# Altium PCB PCBKvant3DPrinter_TopologicalSort.PcbDoc (part 2 of 2)
Units mm, origin at the board's own origin, x right, y up, seen from the top; angles counter-clockwise.
Board outline 112.65 x 119.38 mm, 2 copper layers (Top Layer, Bottom Layer); 226 components, 215 nets, 744 pads, 71 vias.
Unrouted connection lines stored in the file: 213.
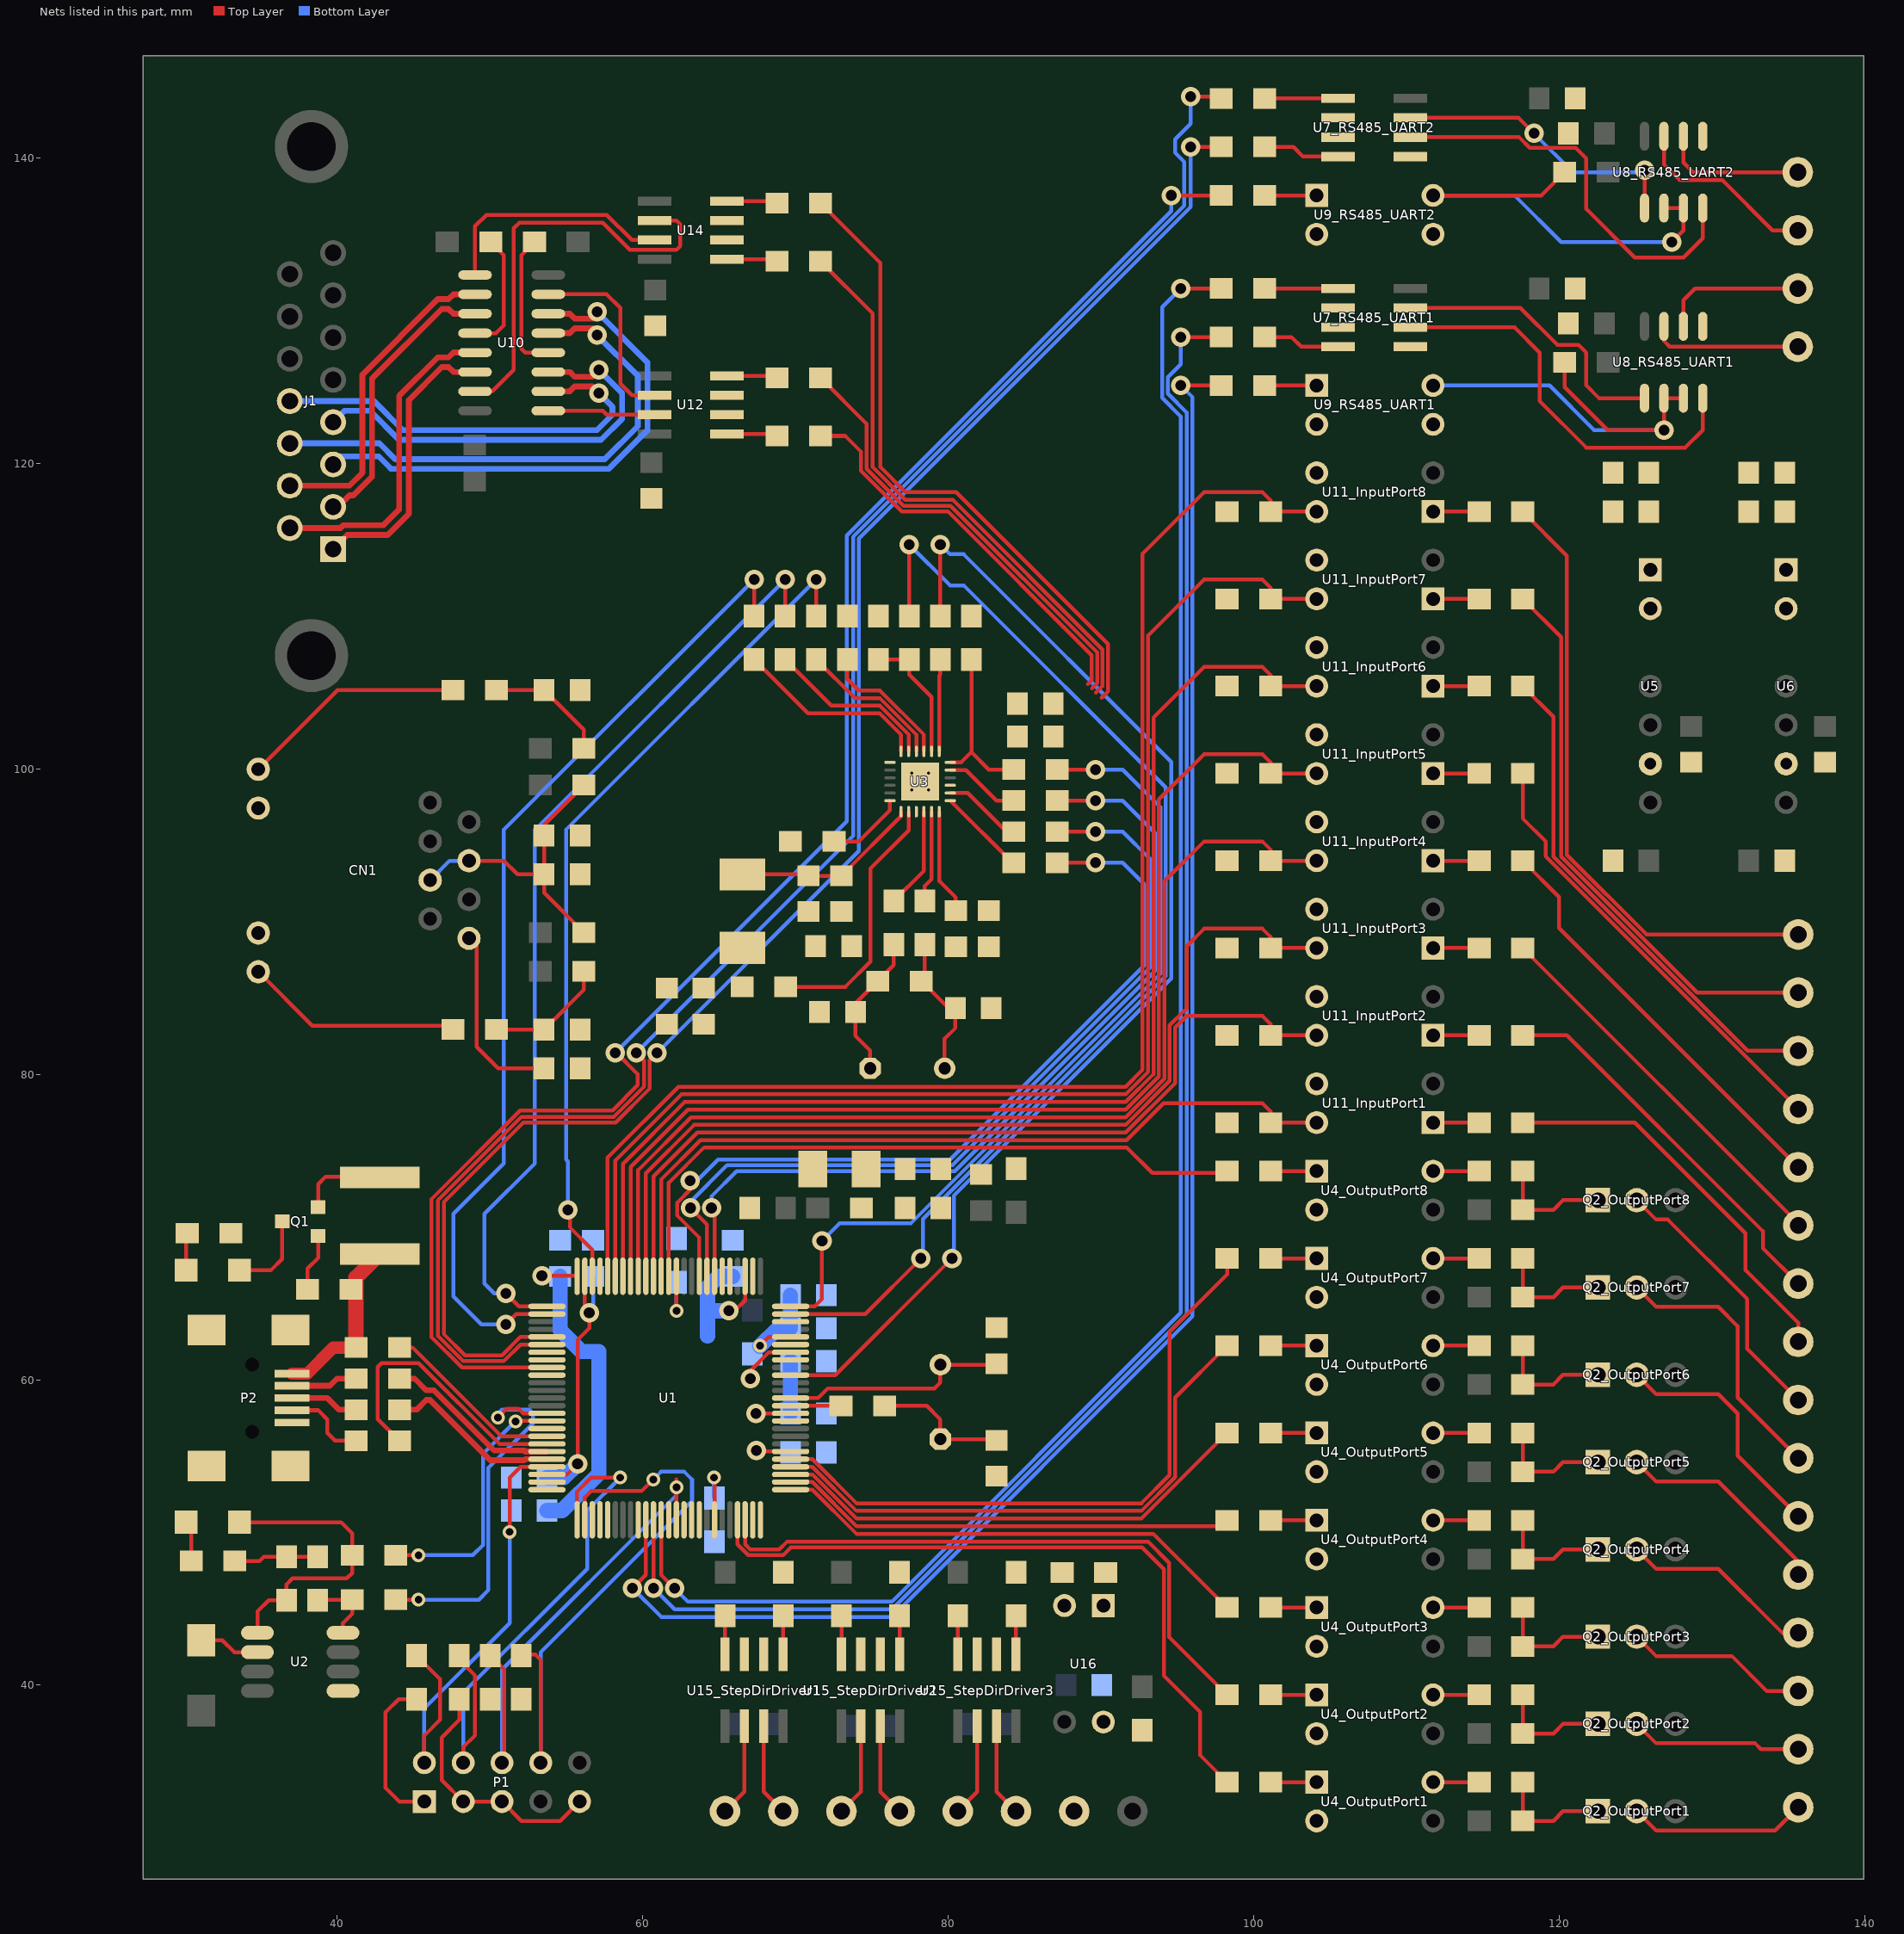
[diagram p2: the nets of this part, all layers, seen from the top]

## Via types
v1: diameter 1.27, hole 0.711, Top Layer to Bottom Layer, 50 vias
v2: diameter 0.9, hole 0.5, Top Layer to Bottom Layer, 11 vias
v3: diameter 0.5, hole 0.2, Top Layer to Bottom Layer, 4 vias
v4: diameter 2.5, hole 1.7, Top Layer to Bottom Layer, 2 vias
v5: diameter 4.25, hole 3.25, Top Layer to Bottom Layer, 2 vias
v6: diameter 1, hole 0.5, Top Layer to Bottom Layer, 2 vias

## Nets (pads, with @x,y where several pads share a name; then routed paths per layer and width w, separated by ;. In a path a pad name is that pad's centre, name@x,y a point inside that pad or via, vN(x,y) a via of type N, cw(c..) or ccw(c..) an arc to the next point about the centre after c; other vN are vias at no path point) (continued)
GND: C1.2 C2.2 C3.2 C4.1 C5.1 C6.1 C7.1 C8.1 C9.1 C10.1 C11.1 C12.1 C13.1 C14.2 C15.1 C16.1 C17.2 C18.1 C19.1 C20.1 C21.1 C22.1 C23.1 C24.1 C25.1 C26.1 C27.1 C28.1 C29.1 C30.1 C31.1 C32.1 C33.1 C34.1 C35.1 C38.1 C39.1 C42_RS485_UART1.1 C42_RS485_UART2.1 C43_RS485_UART1.2 C43_RS485_UART2.2 C44.2 C45.2 P1.3 P1.5 P1.9 P2.5 P2.6 P2.7 P2.8 P2.9 Q1.2 R3.1 R5.1 R6.2 R40.1 R43.1 U1.10 U1.20 U1.27 U1.74 U1.99 U2.1 U3.25 U4_OutputPort1.2 U4_OutputPort2.2 U4_OutputPort3.2 U4_OutputPort4.2 U4_OutputPort5.2 U4_OutputPort6.2 U4_OutputPort7.2 U4_OutputPort8.2 U5.2 U6.2 U7_RS485_UART1.2 U7_RS485_UART1.3 U7_RS485_UART1.5 U7_RS485_UART2.2 U7_RS485_UART2.3 U7_RS485_UART2.5 U8_RS485_UART1.5 U8_RS485_UART2.5 U9_RS485_UART1.2 U9_RS485_UART1.3 U9_RS485_UART2.2 U9_RS485_UART2.3 U11_InputPort1.3 U11_InputPort2.3 U11_InputPort3.3 U11_InputPort4.3 U11_InputPort5.3 U11_InputPort6.3 U11_InputPort7.3 U11_InputPort8.3 U12.2 U12.3 U14.2 U14.3 U15_StepDirDriver1.2 U15_StepDirDriver1.3 U15_StepDirDriver2.2 U15_StepDirDriver2.3 U15_StepDirDriver3.2 U15_StepDirDriver3.3 U16.2 | length 22.2
  Top Layer w0.254: Q1.2@38.767,71.308 38.767,72.803 39.243,73.279 42.759,73.279 C17.2@42.799,73.239 ; R3.1@48.006,39.088 48.006,37.719 46.863,36.576 46.863,33.782 P1.3@48.26,32.385 P1.5@50.8,32.385 52.07,31.115 54.61,31.115 P1.9@55.88,32.385
  other v3: 77.629,98.616 78.729,98.616 77.629,99.716 78.729,99.716
IN_CH_PI1: R54_InputPort1.1 U1.39 U11_InputPort1.4 | length 52.3
  Top Layer w0.254: U1.39@61.222,66.776 61.222,73.105 63.801,75.684 91.686,75.684 94.107,78.105 100.584,78.105 101.12,77.569 R54_InputPort1.1@101.12,76.835 U11_InputPort1.4@104.14,76.835
IN_CH_PI2: R54_InputPort2.1 U1.40 U11_InputPort2.4 | length 57.4
  Top Layer w0.254: U1.40@60.722,66.776 60.722,73.312 63.594,76.184 91.634,76.184 94.869,79.419 94.869,83.058 95.631,83.82 100.584,83.82 101.12,83.284 R54_InputPort2.1@101.12,82.55 U11_InputPort2.4@104.14,82.55
IN_CH_PI3: R54_InputPort3.1 U1.41 U11_InputPort3.4 | length 62.8
  Top Layer w0.254: U1.41@60.222,66.776 60.222,73.519 63.387,76.684 91.633,76.684 94.515,79.566 94.515,83.205 95.484,84.174 95.511,84.174 95.631,84.294 95.631,88.392 96.774,89.535 100.584,89.535 101.12,88.999 R54_InputPort3.1@101.12,88.265 U11_InputPort3.4@104.14,88.265
IN_CH_PI4: R54_InputPort4.1 U1.42 U11_InputPort4.4 | length 68.8
  Top Layer w0.254: U1.42@59.722,66.776 59.722,73.726 63.18,77.184 91.633,77.184 94.161,79.712 94.161,92.637 96.774,95.25 100.584,95.25 101.12,94.714 R54_InputPort4.1@101.12,93.98 U11_InputPort4.4@104.14,93.98
IN_CH_PI5: R54_InputPort5.1 U1.43 U11_InputPort5.4 | length 74.9
  Top Layer w0.254: U1.43@59.222,66.776 59.222,73.934 62.972,77.684 91.632,77.684 93.807,79.859 93.807,97.998 96.774,100.965 100.584,100.965 101.12,100.429 R54_InputPort5.1@101.12,99.695 U11_InputPort5.4@104.14,99.695
IN_CH_PI6: R54_InputPort6.1 U1.44 U11_InputPort6.4 | length 80.9
  Top Layer w0.254: U1.44@58.722,66.776 58.722,74.141 62.765,78.184 91.631,78.184 93.453,80.006 93.453,103.359 96.774,106.68 100.584,106.68 101.12,106.144 R54_InputPort6.1@101.12,105.41 U11_InputPort6.4@104.14,105.41
IN_CH_PI7: R54_InputPort7.1 U1.45 U11_InputPort7.4 | length 86.9
  Top Layer w0.254: U1.45@58.222,66.776 58.222,74.348 62.558,78.684 91.631,78.684 93.099,80.152 93.099,108.72 96.774,112.395 100.584,112.395 101.12,111.859 R54_InputPort7.1@101.12,111.125 U11_InputPort7.4@104.14,111.125
IN_CH_PI8: R54_InputPort8.1 U1.46 U11_InputPort8.4 | length 93
  Top Layer w0.254: U1.46@57.722,66.776 57.722,74.555 62.351,79.184 91.63,79.184 92.745,80.299 92.745,114.081 96.774,118.11 100.584,118.11 101.12,117.574 R54_InputPort8.1@101.12,116.84 U11_InputPort8.4@104.14,116.84
IN_CH_PO1: R45_OutputPort1.1 U1.97 | length 46.3
  Top Layer w0.254: U1.97@66.222,50.826 66.222,49.221 66.929,48.514 69.215,48.514 69.723,49.022 92.71,49.022 94.134,47.598 94.134,40.619 96.52,38.233 96.52,35.405 R45_OutputPort1.1@98.27,33.655
IN_CH_PO2: R45_OutputPort2.1 U1.98 | length 40.5
  Top Layer w0.254: U1.98@66.722,50.826 66.722,49.222 67.049,48.895 68.961,48.895 69.469,49.403 93.091,49.403 94.488,48.006 94.488,43.152 R45_OutputPort2.1@98.27,39.37
IN_CH_PO3: R45_OutputPort3.1 U1.1 | length 31.8
  Top Layer w0.254: U1.1@69.697,52.801 71.12,52.801 74.01,49.911 93.444,49.911 R45_OutputPort3.1@98.27,45.085
IN_CH_PO4: R45_OutputPort4.1 U1.2 | length 29.9
  Top Layer w0.254: U1.2@69.697,53.301 71.121,53.301 74.011,50.411 97.881,50.411 R45_OutputPort4.1@98.27,50.8
IN_CH_PO5: R45_OutputPort5.1 U1.3 | length 32.1
  Top Layer w0.254: U1.3@69.697,53.801 71.121,53.801 74.011,50.911 92.666,50.911 R45_OutputPort5.1@98.27,56.515
IN_CH_PO6: R45_OutputPort6.1 U1.4 | length 37.3
  Top Layer w0.254: U1.4@69.697,54.301 71.122,54.301 74.012,51.411 92.665,51.411 94.869,53.615 94.869,58.829 R45_OutputPort6.1@98.27,62.23
IN_CH_PO7: R45_OutputPort7.1 U1.5 | length 42.5
  Top Layer w0.254: U1.5@69.697,54.801 71.123,54.801 74.012,51.911 92.665,51.911 94.515,53.761 94.515,63.132 98.27,66.887 R45_OutputPort7.1@98.27,67.945
IN_CH_PO8: R45_OutputPort8.1 U1.38 | length 44.4
  Top Layer w0.254: U1.38@61.722,66.776 61.722,72.898 64.038,75.214 91.694,75.214 93.375,73.533 98.143,73.533 R45_OutputPort8.1@98.27,73.66
IP_VCC5V: C36.2 C37.2 R54_InputPort1.2 R54_InputPort2.2 R54_InputPort3.2 R54_InputPort4.2 R54_InputPort5.2 R54_InputPort6.2 R54_InputPort7.2 R54_InputPort8.2 U5.6
LED1_LINK: U3.3
LED2_SPEED: R43.2 U3.2 | length 17.1
  Top Layer w0.254: R43.2@69.37,85.725 73.279,85.725 74.93,87.376 74.93,93.472 77.429,95.971 U3.2@77.429,97.191
LINK_K: CN1.11
LSCAN_LATCH: R56.1 U1.67 | length 26.4
  Top Layer w0.254: R56.1@71.656,121.793 73.279,121.793 74.295,120.777 74.295,119.522 76.977,116.84 80.01,116.84 89.408,107.442 89.408,105.791 89.154,105.537
LVDS_CLK_N: J1.11 U10.5 | length 34.8
  Top Layer w0.381: U10.5@53.835,128.524 55.245,128.524 55.563,128.841 56.769,128.841 57.023,128.587 v1(57.023,128.397)
  Bottom Layer w0.381: J1.11@36.909,121.309 42.775,121.309 43.815,120.269 57.531,120.269 59.69,122.428 59.69,125.73 v1(57.023,128.397)
LVDS_CLK_P: J1.3 U10.6 | length 34.9
  Top Layer w0.381: U10.6@53.835,129.794 55.245,129.794 55.563,129.476 56.769,129.476 57.023,129.73 v1(57.023,129.921)
  Bottom Layer w0.381: J1.3@39.749,119.924 40.28,120.455 42.731,120.455 43.366,119.82 43.552,119.634 57.794,119.634 57.98,119.82 60.325,122.165 60.325,126.622 57.026,129.921 v1(57.023,129.921)
LVDS_DATAX_N: J1.2 U10.11 | length 18.5
  Top Layer w0.381: J1.2@39.749,117.154 40.065,117.154 40.815,117.904 41.078,117.904 42.291,119.117 42.291,125.539 46.863,130.111 47.308,130.111 47.625,129.794 U10.11@49.035,129.794
LVDS_DATAX_P: J1.10 U10.10 | length 21.1
  Top Layer w0.381: J1.10@36.909,118.539 40.815,118.539 41.656,119.38 41.656,125.802 46.6,130.746 47.308,130.746 47.625,131.064 U10.10@49.035,131.064
LVDS_DATAY_N: J1.1 U10.14 | length 18.7
  Top Layer w0.381: J1.1@39.749,114.384 40.681,115.316 43.316,115.316 44.704,116.704 44.704,124.142 46.863,126.301 47.308,126.301 47.625,125.984 U10.14@49.035,125.984
LVDS_DATAY_P: J1.9 U10.13 | length 21.2
  Top Layer w0.381: J1.9@36.909,115.769 40.236,115.769 40.418,115.951 43.053,115.951 44.069,116.967 44.069,124.405 46.6,126.936 47.308,126.936 47.625,127.254 U10.13@49.035,127.254
LVDS_STROBE_N: J1.12 U10.2 | length 27.7
  Top Layer w0.381: U10.2@53.835,124.714 55.245,124.714 55.563,125.031 56.706,125.031 v1(57.15,124.587)
  Bottom Layer w0.381: J1.12@36.909,124.079 42.418,124.079 44.323,122.174 57.023,122.174 58.039,123.19 58.039,123.698 v1(57.15,124.587)
LVDS_STROBE_P: J1.4 U10.3 | length 28
  Top Layer w0.381: U10.3@53.835,125.984 55.245,125.984 55.563,125.666 56.706,125.666 v1(57.15,126.111)
  Bottom Layer w0.381: J1.4@39.749,122.694 40.499,123.444 42.155,123.444 44.06,121.539 57.286,121.539 58.674,122.927 58.674,124.59 57.153,126.111 v1(57.15,126.111)
MCU_MISO: U1.79
MCU_MOSI: U1.80
MCU_RTS1: R51_RS485_UART1.1 U1.85 | length 114.3
  Top Layer w0.254: v1(59.352,46.355) 60.222,47.225 U1.85@60.222,50.826 ; v1(95.25,125.095) R51_RS485_UART1.1@97.889,125.095
  Bottom Layer w0.254: v1(59.352,46.355) 61.241,44.466 76.328,44.466 96.012,64.15 96.012,124.333 v1(95.25,125.095)
MCU_RTS2: R51_RS485_UART2.1 U1.59 | length 111.3
  Top Layer w0.254: U1.59@53.747,60.801 48.18,60.801 46.196,62.785 46.196,71.835 51.99,77.629 58.039,77.629 59.69,79.28 59.69,80.01 58.293,81.407 v1(58.22,81.407) ; v1(94.615,137.541) R51_RS485_UART2.1@97.889,137.541
  Bottom Layer w0.254: v1(58.22,81.407) 73.374,96.561 73.374,115.277 94.615,136.518 v1(94.615,137.541)
MCU_RX1: R48_RS485_UART1.1 U1.87 | length 116.9
  Top Layer w0.254: U1.87@61.222,50.826 61.222,47.225 v1@62.092,46.355 ; v1(95.25,131.445) R48_RS485_UART1.1@97.889,131.445
  Bottom Layer w0.254: v1(62.103,46.355) 62.103,46.344 62.981,45.466 76.327,45.466 95.25,64.389 95.25,123.063 94.034,124.279 94.034,130.229 v1(95.25,131.445)
MCU_RX2: R48_RS485_UART2.1 U1.56 | length 116.4
  Top Layer w0.254: U1.56@53.747,62.301 52.014,62.301 50.927,61.214 48.267,61.214 46.609,62.872 46.609,71.748 52.077,77.216 58.127,77.216 60.103,79.192 60.103,80.894 v1(59.59,81.407) ; v1(95.885,144.018) 97.762,144.018 R48_RS485_UART2.1@97.889,143.891
  Bottom Layer w0.254: v1(59.59,81.407) 73.787,95.604 73.787,115.189 95.477,136.879 95.477,139.727 94.869,140.335 94.869,141.224 95.885,142.24 v1(95.885,144.018)
MCU_SCK: U1.78
MCU_TX1: R49_RS485_UART1.1 U1.86 | length 115.5
  Top Layer w0.254: v1(60.722,46.355) U1.86@60.722,50.826 ; v1(95.25,128.27) R49_RS485_UART1.1@97.889,128.27
  Bottom Layer w0.254: v1(60.722,46.355) 62.111,44.966 76.328,44.966 95.631,64.269 95.631,123.317 94.388,124.56 94.388,125.63 95.25,126.492 v1(95.25,128.27)
MCU_TX2: R49_RS485_UART2.1 U1.55 | length 111.4
  Top Layer w0.254: U1.55@53.747,62.801 52.006,62.801 50.8,61.595 48.387,61.595 46.99,62.992 46.99,71.628 52.197,76.835 58.246,76.835 60.484,79.073 60.484,80.931 v1(60.96,81.407) ; v1(95.885,140.716) R49_RS485_UART2.1@97.889,140.716
  Bottom Layer w0.254: v1(60.96,81.407) 74.168,94.615 74.168,115.069 95.885,136.786 v1(95.885,140.716)
MDC: R35.1 U1.16 | length 77.9
  Top Layer w0.254: U1.16@69.697,60.301 72.62,60.301 v1(80.264,67.945) ; R35.1@79.502,110.01 v1(79.502,114.681)
  Bottom Layer w0.254: v1(79.502,114.681) 80.137,114.046 81.026,114.046 94.615,100.457 94.615,86.282 80.391,72.058 80.391,68.58 80.264,68.453 v1(80.264,67.945)
MDIO: R34.1 U1.25 | length 54.1
  Top Layer w0.254: U1.25@69.697,64.801 71.278,64.801 71.755,65.278 v1(71.755,69.088) ; R34.1@87.15,99.949 v1(89.662,99.949)
  Bottom Layer w0.254: v1(71.755,69.088) 72.898,70.231 77.562,70.231 93.907,86.576 93.907,97.482 91.44,99.949 v1(89.662,99.949)
MOTOR_STP1: R52_StepDirDriver1.1 U1.23
MOTOR_STP2: R52_StepDirDriver2.1 U1.31
MOTOR_STP3: R52_StepDirDriver3.1 U1.92
MOTORS_EN: R63.1 U1.60
NetC7_2: C7.2 C8.2 R7.2 U1.21 | length 6.9
  Top Layer w0.254: v2(67.691,62.23) 68.262,62.801 U1.21@69.697,62.801
  Bottom Layer w0.254: R7.2@67.691,62.202 v2(67.691,62.23)
  Bottom Layer w1: R7.2@67.691,62.202 68.862,63.373 C8.2@69.691,63.373 C7.2@69.691,65.532
NetC9_2: C9.2 C10.2 L1.2 R8.2
NetC12_2: C12.2 C13.2 U1.49 U1.73 | length 19.4
  Top Layer w0.254: U1.73@53.747,53.801 55.071,53.801 v1(55.753,54.483) 55.753,62.611 56.515,63.373 v1(56.515,64.389) 56.222,64.682 U1.49@56.222,66.776
  Bottom Layer w0.254: v1@56.769,64.77 C12.2@56.769,66.77
  Bottom Layer w1: C13.2@53.753,53.594 54.864,53.594 v1(55.753,54.483)
NetC15_2: C15.2 R9.2 Y1.1 | length 9
  Top Layer w0.254: R9.2@75.847,58.293 78.613,58.293 79.502,57.404 Y1.1@79.502,56.107 83.117,56.107 C15.2@83.185,56.039
NetC16_2: C16.2 U1.13 Y1.2 | length 15.1
  Top Layer w0.254: U1.13@69.697,58.801 71.501,58.801 72.136,59.436 79.121,59.436 79.502,59.817 Y1.2@79.502,60.987 83.117,60.987 C16.2@83.185,61.055
NetC17_1: C17.1 D2.1 P2.1 R12.1 R18.2 U2.6 | length 15.7
  Top Layer w0.254: D2.1@31.115,42.94 32.498,42.94 33.274,42.164 U2.6@34.792,42.164
  Top Layer w0.8: P2.1@37.06,60.401 38.049,60.401 39.751,62.103 R18.2@41.247,62.103
  Top Layer w1: R18.2@41.247,62.103 41.247,66.687 C17.1@42.799,68.239
NetC26_2: C26.2 C27.2 L2.2 U3.1 U3.19 | length 12.3
  Top Layer w0.254: L2.2@66.548,93.083 70.779,93.083 C26.2@70.866,92.996 C27.2@73.025,92.996 76.929,96.9 U3.1@76.929,97.191
NetC28_2: C28.2 CN1.8 | length 12.3
  Top Layer w0.254: CN1.8@48.641,88.9 49.149,88.392 49.149,81.788 50.546,80.391 C28.2@53.562,80.391
NetC29_2: C29.2 R41.2 U3.4 | length 6.7
  Top Layer w0.254: R41.2@76.454,91.341 78.429,93.316 U3.4@78.429,97.191
NetC32_2: C32.2 R41.1 R44.1 X1.1 | length 9.5
  Top Layer w0.254: X1.1@74.903,80.391 74.903,81.561 73.946,82.518 C32.2@73.946,84.074 73.946,84.642 R44.1@75.41,86.106 76.454,87.15 R41.1@76.454,88.491
NetC33_2: C33.2 R42.1 R44.2 X1.2 | length 9.7
  Top Layer w0.254: R42.1@78.486,88.491 78.486,86.332 R44.2@78.26,86.106 80.038,84.328 C33.2@80.486,84.328 80.486,83.026 79.783,82.323 X1.2@79.783,80.391
NetC57_1: C57.1 P14.1 R62.1 U16.4
NetCN1_9: CN1.9 R38.2 | length 14.9
  Top Layer w0.254: CN1.9@34.851,99.97 40.037,105.156 R38.2@47.597,105.156
NetCN1_12: CN1.12 R39.2 | length 14.3
  Top Layer w0.254: CN1.12@34.851,86.71 38.376,83.185 47.343,83.185 R39.2@47.597,82.931
NetD1_1: D1.1 R11.1 | length 2.4
  Top Layer w0.254: D1.1@30.127,67.183 30.127,69.525 R11.1@30.198,69.596
NetD1_2: D1.2 Q1.1 | length 5.5
  Top Layer w0.254: D1.2@33.627,67.183 35.687,67.183 36.417,67.913 Q1.1@36.417,70.358
NetD8_1: D8.1 R13.1 | length 2.7
  Top Layer w0.254: D8.1@30.127,50.673 30.452,50.348 R13.1@30.452,48.133
NetD8_2: D8.2 R15.1 R17.2 U2.5 | length 19.5
  Top Layer w0.254: D8.2@33.627,50.673 40.259,50.673 40.993,49.939 R17.2@40.993,48.514 40.993,47.343 40.64,46.99 37.084,46.99 36.703,46.609 R15.1@36.703,45.565 35.532,45.565 34.792,44.825 U2.5@34.792,43.434
NetP2_4: P2.4 R21.2 | length 5.5
  Top Layer w0.254: P2.4@37.06,58.001 38.773,58.001 39.37,57.404 39.37,56.515 39.878,56.007 R21.2@41.247,56.007
NetP3_RS485_UART1_1: P3_RS485_UART1.1 U8_RS485_UART1.7 | length 9.9
  Top Layer w0.254: U8_RS485_UART1.7@126.873,128.969 126.873,128.016 127.254,127.635 P3_RS485_UART1.1@135.636,127.635
NetP3_RS485_UART1_2: P3_RS485_UART1.2 U8_RS485_UART1.6 | length 9.5
  Top Layer w0.254: U8_RS485_UART1.6@128.143,128.969 128.143,130.683 128.905,131.445 P3_RS485_UART1.2@135.636,131.445
NetP3_RS485_UART2_1: P3_RS485_UART2.1 U8_RS485_UART2.7 | length 12.4
  Top Layer w0.254: U8_RS485_UART2.7@126.873,141.415 126.873,139.573 127.889,138.557 130.683,138.557 133.985,135.255 P3_RS485_UART2.1@135.636,135.255
NetP3_RS485_UART2_2: P3_RS485_UART2.2 U8_RS485_UART2.6 | length 9.5
  Top Layer w0.254: U8_RS485_UART2.6@128.143,141.415 128.143,139.7 128.778,139.065 P3_RS485_UART2.2@135.636,139.065
NetP12_2: R57.1 | length 29.8
  Top Layer w0.254: R57.1@71.656,125.603 74.676,122.583 74.676,119.641 77.096,117.221 80.168,117.221 89.762,107.627 89.762,105.606 89.423,105.268
NetP13_StepDirDriver1_1: P13_StepDirDriver1.1 U15_StepDirDriver1.6 | length 6.1
  Top Layer w0.254: P13_StepDirDriver1.1@65.405,31.75 66.675,33.02 U15_StepDirDriver1.6@66.675,37.313
NetP13_StepDirDriver1_2: P13_StepDirDriver1.2 U15_StepDirDriver1.7 | length 6.1
  Top Layer w0.254: U15_StepDirDriver1.7@67.945,37.313 67.945,33.02 P13_StepDirDriver1.2@69.215,31.75
NetP13_StepDirDriver2_1: P13_StepDirDriver2.1 U15_StepDirDriver2.6 | length 6.1
  Top Layer w0.254: P13_StepDirDriver2.1@73.025,31.75 74.295,33.02 U15_StepDirDriver2.6@74.295,37.313
NetP13_StepDirDriver2_2: P13_StepDirDriver2.2 U15_StepDirDriver2.7 | length 6.1
  Top Layer w0.254: U15_StepDirDriver2.7@75.565,37.313 75.565,33.02 P13_StepDirDriver2.2@76.835,31.75
NetP13_StepDirDriver3_1: P13_StepDirDriver3.1 U15_StepDirDriver3.6 | length 6.1
  Top Layer w0.254: P13_StepDirDriver3.1@80.645,31.75 81.915,33.02 U15_StepDirDriver3.6@81.915,37.313
NetP13_StepDirDriver3_2: P13_StepDirDriver3.2 U15_StepDirDriver3.7 | length 6.1
  Top Layer w0.254: U15_StepDirDriver3.7@83.185,37.313 83.185,33.02 P13_StepDirDriver3.2@84.455,31.75
NetQ1_3: Q1.3 R12.2 | length 3.8
  Top Layer w0.254: R12.2@38.072,65.913 38.072,67.282 38.767,67.977 Q1.3@38.767,69.408
NetQ2_OutputPort1_1: Q2_OutputPort1.1 R46_OutputPort1.2 R47_OutputPort1.2 | length 7.7
  Top Layer w0.254: R46_OutputPort1.2@117.63,33.655 R47_OutputPort1.2@117.63,31.115 119.634,31.115 120.269,31.75 Q2_OutputPort1.1@122.555,31.75
NetQ2_OutputPort2_1: Q2_OutputPort2.1 R46_OutputPort2.2 R47_OutputPort2.2 | length 7.7
  Top Layer w0.254: R46_OutputPort2.2@117.63,39.37 R47_OutputPort2.2@117.63,36.83 119.634,36.83 120.269,37.465 Q2_OutputPort2.1@122.555,37.465
NetQ2_OutputPort3_1: Q2_OutputPort3.1 R46_OutputPort3.2 R47_OutputPort3.2 | length 7.7
  Top Layer w0.254: R46_OutputPort3.2@117.63,45.085 R47_OutputPort3.2@117.63,42.545 119.634,42.545 120.269,43.18 Q2_OutputPort3.1@122.555,43.18
NetQ2_OutputPort4_1: Q2_OutputPort4.1 R46_OutputPort4.2 R47_OutputPort4.2 | length 7.7
  Top Layer w0.254: R46_OutputPort4.2@117.63,50.8 R47_OutputPort4.2@117.63,48.26 119.634,48.26 120.269,48.895 Q2_OutputPort4.1@122.555,48.895
NetQ2_OutputPort5_1: Q2_OutputPort5.1 R46_OutputPort5.2 R47_OutputPort5.2 | length 7.7
  Top Layer w0.254: R46_OutputPort5.2@117.63,56.515 R47_OutputPort5.2@117.63,53.975 119.634,53.975 120.269,54.61 Q2_OutputPort5.1@122.555,54.61
NetQ2_OutputPort6_1: Q2_OutputPort6.1 R46_OutputPort6.2 R47_OutputPort6.2 | length 7.7
  Top Layer w0.254: R46_OutputPort6.2@117.63,62.23 R47_OutputPort6.2@117.63,59.69 119.634,59.69 120.269,60.325 Q2_OutputPort6.1@122.555,60.325
NetQ2_OutputPort7_1: Q2_OutputPort7.1 R46_OutputPort7.2 R47_OutputPort7.2 | length 7.7
  Top Layer w0.254: R46_OutputPort7.2@117.63,67.945 R47_OutputPort7.2@117.63,65.405 119.634,65.405 120.269,66.04 Q2_OutputPort7.1@122.555,66.04
NetQ2_OutputPort8_1: Q2_OutputPort8.1 R46_OutputPort8.2 R47_OutputPort8.2 | length 7.7
  Top Layer w0.254: R46_OutputPort8.2@117.63,73.66 R47_OutputPort8.2@117.63,71.12 119.634,71.12 120.269,71.755 Q2_OutputPort8.1@122.555,71.755
NetR5_2: R5.2 U1.37 | length 4.1
  Top Layer w0.254: U1.37@62.222,66.776 62.222,64.524 v2(62.23,64.516)
  Bottom Layer w0.254: v2(62.23,64.516) R5.2@62.23,66.393
NetR6_1: R6.1 U1.94 | length 4.2
  Top Layer w0.254: v2(64.674,53.594) 64.722,53.546 U1.94@64.722,50.826
  Bottom Layer w0.254: v2(64.674,53.594) 64.674,52.299 R6.1@64.722,52.251
NetR9_1: R9.1 U1.12 | length 3.3
  Top Layer w0.254: U1.12@69.697,58.301 72.989,58.301 R9.1@72.997,58.293
NetR14_1: R14.1 R16.2 U2.4 | length 4.7
  Top Layer w0.254: R14.1@38.735,45.565 38.763,45.593 R16.2@40.993,45.593 40.993,44.676 40.392,44.075 U2.4@40.392,43.434
NetR22_1: R22.1 R34.2 U3.12 | length 11
  Top Layer w0.254: U3.12@80.154,100.416 80.858,100.416 81.534,101.092 ; R22.1@81.534,107.16 81.534,101.092 ; R34.2@84.3,99.949 82.677,99.949 81.534,101.092
NetR23_1: R23.1 R36.2 U3.14 | length 8.7
  Top Layer w0.254: R23.1@75.438,107.16 R36.2@77.47,107.16 77.47,106.172 78.929,104.713 U3.14@78.929,101.141
NetR28_2: R28.2 U3.16 | length 9.7
  Top Layer w0.254: R28.2@71.374,107.16 73.902,104.632 75.533,104.632 77.929,102.236 U3.16@77.929,101.141
NetR29_2: R29.2 U3.17 | length 11.2
  Top Layer w0.254: R29.2@69.342,107.16 72.37,104.132 75.533,104.132 77.429,102.236 U3.17@77.429,101.141
NetR30_2: R30.2 U3.18 | length 12.8
  Top Layer w0.254: R30.2@67.31,107.16 70.838,103.632 75.532,103.632 76.929,102.235 U3.18@76.929,101.141
NetR31_2: R31.2 U3.7 | length 5.8
  Top Layer w0.254: U3.7@80.154,97.916 84.217,93.853 R31.2@84.3,93.853
NetR32_2: R32.2 U3.8 | length 5.2
  Top Layer w0.254: U3.8@80.154,98.416 81.289,98.416 83.82,95.885 R32.2@84.3,95.885
NetR33_2: R33.2 U3.11 | length 5
  Top Layer w0.254: U3.11@80.154,99.916 81.186,99.916 83.185,97.917 R33.2@84.3,97.917
NetR35_2: R35.2 U3.13 | length 6
  Top Layer w0.254: U3.13@79.429,101.141 79.429,106.099 79.502,106.172 R35.2@79.502,107.16
NetR37_2: R37.2 U3.15 | length 8.9
  Top Layer w0.254: R37.2@73.406,107.16 73.406,105.894 74.168,105.132 75.534,105.132 78.429,102.237 U3.15@78.429,101.141
NetR40_2: R40.2 U3.24 | length 5.1
  Top Layer w0.254: R40.2@72.545,95.25 74.168,95.25 76.204,97.286 U3.24@76.204,97.916
NetR42_2: R42.2 U3.5 | length 6
  Top Layer w0.254: R42.2@78.486,91.341 78.486,92.329 78.929,92.772 U3.5@78.929,97.191
NetR45_OutputPort1_2: R45_OutputPort1.2 U4_OutputPort1.1 | length 3
  Top Layer w0.254: R45_OutputPort1.2@101.12,33.655 U4_OutputPort1.1@104.14,33.655
NetR45_OutputPort2_2: R45_OutputPort2.2 U4_OutputPort2.1 | length 3
  Top Layer w0.254: R45_OutputPort2.2@101.12,39.37 U4_OutputPort2.1@104.14,39.37
NetR45_OutputPort3_2: R45_OutputPort3.2 U4_OutputPort3.1 | length 3
  Top Layer w0.254: R45_OutputPort3.2@101.12,45.085 U4_OutputPort3.1@104.14,45.085
NetR45_OutputPort4_2: R45_OutputPort4.2 U4_OutputPort4.1 | length 3
  Top Layer w0.254: R45_OutputPort4.2@101.12,50.8 U4_OutputPort4.1@104.14,50.8
NetR45_OutputPort5_2: R45_OutputPort5.2 U4_OutputPort5.1 | length 3
  Top Layer w0.254: R45_OutputPort5.2@101.12,56.515 U4_OutputPort5.1@104.14,56.515
NetR45_OutputPort6_2: R45_OutputPort6.2 U4_OutputPort6.1 | length 3
  Top Layer w0.254: R45_OutputPort6.2@101.12,62.23 U4_OutputPort6.1@104.14,62.23
NetR45_OutputPort7_2: R45_OutputPort7.2 U4_OutputPort7.1 | length 3
  Top Layer w0.254: R45_OutputPort7.2@101.12,67.945 U4_OutputPort7.1@104.14,67.945
NetR45_OutputPort8_2: R45_OutputPort8.2 U4_OutputPort8.1 | length 3
  Top Layer w0.254: R45_OutputPort8.2@101.12,73.66 U4_OutputPort8.1@104.14,73.66
NetR46_OutputPort1_1: R46_OutputPort1.1 U4_OutputPort1.4 | length 3
  Top Layer w0.254: U4_OutputPort1.4@111.76,33.655 R46_OutputPort1.1@114.78,33.655
NetR46_OutputPort2_1: R46_OutputPort2.1 U4_OutputPort2.4 | length 3
  Top Layer w0.254: U4_OutputPort2.4@111.76,39.37 R46_OutputPort2.1@114.78,39.37
NetR46_OutputPort3_1: R46_OutputPort3.1 U4_OutputPort3.4 | length 3
  Top Layer w0.254: U4_OutputPort3.4@111.76,45.085 R46_OutputPort3.1@114.78,45.085
NetR46_OutputPort4_1: R46_OutputPort4.1 U4_OutputPort4.4 | length 3
  Top Layer w0.254: U4_OutputPort4.4@111.76,50.8 R46_OutputPort4.1@114.78,50.8
NetR46_OutputPort5_1: R46_OutputPort5.1 U4_OutputPort5.4 | length 3
  Top Layer w0.254: U4_OutputPort5.4@111.76,56.515 R46_OutputPort5.1@114.78,56.515
NetR46_OutputPort6_1: R46_OutputPort6.1 U4_OutputPort6.4 | length 3
  Top Layer w0.254: U4_OutputPort6.4@111.76,62.23 R46_OutputPort6.1@114.78,62.23
NetR46_OutputPort7_1: R46_OutputPort7.1 U4_OutputPort7.4 | length 3
  Top Layer w0.254: U4_OutputPort7.4@111.76,67.945 R46_OutputPort7.1@114.78,67.945
NetR46_OutputPort8_1: R46_OutputPort8.1 U4_OutputPort8.4 | length 3
  Top Layer w0.254: U4_OutputPort8.4@111.76,73.66 R46_OutputPort8.1@114.78,73.66
NetR48_RS485_UART1_2: R48_RS485_UART1.2 U7_RS485_UART1.1 | length 4.8
  Top Layer w0.254: R48_RS485_UART1.2@100.739,131.445 U7_RS485_UART1.1@105.537,131.445
NetR48_RS485_UART2_2: R48_RS485_UART2.2 U7_RS485_UART2.1 | length 4.8
  Top Layer w0.254: R48_RS485_UART2.2@100.739,143.891 U7_RS485_UART2.1@105.537,143.891
NetR49_RS485_UART1_2: R49_RS485_UART1.2 U7_RS485_UART1.4 | length 5.1
  Top Layer w0.254: R49_RS485_UART1.2@100.739,128.27 102.489,128.27 103.124,127.635 U7_RS485_UART1.4@105.537,127.635
NetR49_RS485_UART2_2: R49_RS485_UART2.2 U7_RS485_UART2.4 | length 5.1
  Top Layer w0.254: R49_RS485_UART2.2@100.739,140.716 102.616,140.716 103.251,140.081 U7_RS485_UART2.4@105.537,140.081
NetR50_RS485_UART1_1: R50_RS485_UART1.1 U8_RS485_UART1.2 U8_RS485_UART1.3 U9_RS485_UART1.4 | length 29
  Top Layer w0.254: R50_RS485_UART1.1@120.368,126.619 120.368,124.996 123.19,122.174 v1(126.873,122.174) U8_RS485_UART1.2@126.873,124.269 U8_RS485_UART1.3@128.143,124.269
  Bottom Layer w0.254: U9_RS485_UART1.4@111.76,125.095 119.38,125.095 122.301,122.174 v1(126.873,122.174)
NetR50_RS485_UART2_1: R50_RS485_UART2.1 U8_RS485_UART2.2 U8_RS485_UART2.3 U9_RS485_UART2.4 | length 29.9
  Top Layer w0.254: U9_RS485_UART2.4@111.76,137.541 118.844,137.541 R50_RS485_UART2.1@120.368,139.065 ; U8_RS485_UART2.2@126.873,136.715 U8_RS485_UART2.3@128.143,136.715 128.143,135.255 v1(127.381,134.493)
  Bottom Layer w0.254: U9_RS485_UART2.4@111.76,137.541 117.094,137.541 120.142,134.493 v1(127.381,134.493)
NetR51_RS485_UART1_2: R51_RS485_UART1.2 U9_RS485_UART1.1 | length 3.4
  Top Layer w0.254: R51_RS485_UART1.2@100.739,125.095 U9_RS485_UART1.1@104.14,125.095
NetR51_RS485_UART2_2: R51_RS485_UART2.2 U9_RS485_UART2.1 | length 3.4
  Top Layer w0.254: R51_RS485_UART2.2@100.739,137.541 U9_RS485_UART2.1@104.14,137.541
NetR52_StepDirDriver1_2: R52_StepDirDriver1.2 U15_StepDirDriver1.1 | length 2.5
  Top Layer w0.254: U15_StepDirDriver1.1@69.215,42.037 R52_StepDirDriver1.2@69.215,44.549
NetR52_StepDirDriver2_2: R52_StepDirDriver2.2 U15_StepDirDriver2.1 | length 2.5
  Top Layer w0.254: U15_StepDirDriver2.1@76.835,42.037 R52_StepDirDriver2.2@76.835,44.549
NetR52_StepDirDriver3_2: R52_StepDirDriver3.2 U15_StepDirDriver3.1 | length 2.5
  Top Layer w0.254: U15_StepDirDriver3.1@84.455,42.037 R52_StepDirDriver3.2@84.455,44.549
NetR53_StepDirDriver1_2: R53_StepDirDriver1.2 U15_StepDirDriver1.4 | length 2.5
  Top Layer w0.254: U15_StepDirDriver1.4@65.405,42.037 R53_StepDirDriver1.2@65.405,44.549
NetR53_StepDirDriver2_2: R53_StepDirDriver2.2 U15_StepDirDriver2.4 | length 2.5
  Top Layer w0.254: U15_StepDirDriver2.4@73.025,42.037 R53_StepDirDriver2.2@73.025,44.549
NetR53_StepDirDriver3_2: R53_StepDirDriver3.2 U15_StepDirDriver3.4 | length 2.5
  Top Layer w0.254: U15_StepDirDriver3.4@80.645,42.037 R53_StepDirDriver3.2@80.645,44.549
NetR55_InputPort1_1: R55_InputPort1.1 U11_InputPort1.1 | length 3
  Top Layer w0.254: U11_InputPort1.1@111.76,76.835 R55_InputPort1.1@114.78,76.835
NetR55_InputPort2_1: R55_InputPort2.1 U11_InputPort2.1 | length 3
  Top Layer w0.254: U11_InputPort2.1@111.76,82.55 R55_InputPort2.1@114.78,82.55
NetR55_InputPort3_1: R55_InputPort3.1 U11_InputPort3.1 | length 3
  Top Layer w0.254: U11_InputPort3.1@111.76,88.265 R55_InputPort3.1@114.78,88.265
NetR55_InputPort4_1: R55_InputPort4.1 U11_InputPort4.1 | length 3
  Top Layer w0.254: U11_InputPort4.1@111.76,93.98 R55_InputPort4.1@114.78,93.98
NetR55_InputPort5_1: R55_InputPort5.1 U11_InputPort5.1 | length 3
  Top Layer w0.254: U11_InputPort5.1@111.76,99.695 R55_InputPort5.1@114.78,99.695
NetR55_InputPort6_1: R55_InputPort6.1 U11_InputPort6.1 | length 3
  Top Layer w0.254: U11_InputPort6.1@111.76,105.41 R55_InputPort6.1@114.78,105.41
NetR55_InputPort7_1: R55_InputPort7.1 U11_InputPort7.1 | length 3
  Top Layer w0.254: U11_InputPort7.1@111.76,111.125 R55_InputPort7.1@114.78,111.125
NetR55_InputPort8_1: R55_InputPort8.1 U11_InputPort8.1 | length 3
  Top Layer w0.254: U11_InputPort8.1@111.76,116.84 R55_InputPort8.1@114.78,116.84
NetR56_2: R56.2 U12.1 | length 3.3
  Top Layer w0.254: U12.1@65.532,121.92 68.679,121.92 R56.2@68.806,121.793
NetR57_2: R57.2 U12.4 | length 3.3
  Top Layer w0.254: U12.4@65.532,125.73 68.679,125.73 R57.2@68.806,125.603
NetR58_2: R58.2 U14.1 | length 3.3
  Top Layer w0.254: U14.1@65.532,133.35 68.679,133.35 R58.2@68.806,133.223
NetR59_2: R59.2 U14.4 | length 3.3
  Top Layer w0.254: U14.4@65.532,137.16 68.679,137.16 R59.2@68.806,137.033
NetR60_2: R60.2 U10.12 | length 7.9
  Top Layer w0.254: U10.12@49.035,128.524 50.419,128.524 50.927,129.032 50.927,133.632 R60.2@50.066,134.493
NetR61_2: R61.2 U10.4 | length 9.2
  Top Layer w0.254: R61.2@52.931,134.493 52.07,133.632 52.07,127.508 52.324,127.254 U10.4@53.835,127.254
NetR63_2: R63.2 U16.1
NetU7_RS485_UART1_6: U7_RS485_UART1.6 U8_RS485_UART1.4 | length 26.8
  Top Layer w0.254: U7_RS485_UART1.6@110.261,128.905 117.094,128.905 118.745,127.254 118.745,124.079 121.793,121.031 128.27,121.031 129.413,122.174 U8_RS485_UART1.4@129.413,124.269
NetU7_RS485_UART1_7: U7_RS485_UART1.7 U8_RS485_UART1.1 | length 19.1
  Top Layer w0.254: U7_RS485_UART1.7@110.261,130.175 117.475,130.175 119.888,127.762 121.285,127.762 121.793,127.254 121.793,125.095 122.619,124.269 U8_RS485_UART1.1@125.603,124.269
NetU7_RS485_UART2_6: U7_RS485_UART2.6 U8_RS485_UART2.4 | length 26.8
  Top Layer w0.254: U7_RS485_UART2.6@110.261,141.351 117.399,141.351 118.097,140.653 121.094,140.653 121.793,139.954 121.793,136.652 124.968,133.477 128.143,133.477 129.413,134.747 U8_RS485_UART2.4@129.413,136.715
NetU7_RS485_UART2_7: U7_RS485_UART2.7 U8_RS485_UART2.1 | length 19.4
  Top Layer w0.254: U7_RS485_UART2.7@110.261,142.621 117.348,142.621 v1(118.364,141.605) ; U8_RS485_UART2.1@125.603,136.715 v1(125.603,139.192)
  Bottom Layer w0.254: v1(118.364,141.605) 120.904,139.065 125.603,139.065 v1(125.603,139.192)
NetU10_1: U10.1 U12.7 | length 7.1
  Top Layer w0.254: U10.1@53.835,123.444 57.404,123.444 57.658,123.19 U12.7@60.808,123.19
NetU10_7: U10.7 U12.6 | length 12.6
  Top Layer w0.254: U10.7@53.835,131.064 57.658,131.064 58.547,130.175 58.547,125.222 59.309,124.46 U12.6@60.808,124.46
NetU10_9: U10.9 U14.7 | length 16
  Top Layer w0.254: U10.9@49.035,132.334 49.035,135.522 49.784,136.271 57.658,136.271 59.309,134.62 U14.7@60.808,134.62
NetU10_15: U10.15 U14.6 | length 27.5
  Top Layer w0.254: U10.15@49.035,124.714 50.165,124.714 51.562,126.111 51.562,135.382 51.943,135.763 57.404,135.763 59.182,133.985 62.23,133.985 62.484,134.239 62.484,135.636 62.23,135.89 U14.6@60.808,135.89
OP_VCC5V: C40.2 C41.2 U6.6
OUT_CH_PI1: P8.1 R55_InputPort1.2 | length 26.1
  Top Layer w0.254: R55_InputPort1.2@117.63,76.835 124.968,76.835 132.207,69.596 132.207,67.183 135.668,63.722 P8.1@135.668,62.484
OUT_CH_PI2: P8.2 R55_InputPort2.2 | length 25.4
  Top Layer w0.254: R55_InputPort2.2@117.63,82.55 120.523,82.55 133.35,69.723 133.35,68.612 P8.2@135.668,66.294
OUT_CH_PI3: P9.1 R55_InputPort3.2 | length 25.6
  Top Layer w0.254: R55_InputPort3.2@117.63,88.265 135.668,70.227 P9.1@135.668,70.104
OUT_CH_PI4: P9.2 R55_InputPort4.2 | length 27.5
  Top Layer w0.254: R55_InputPort4.2@117.63,93.98 120.015,91.595 120.015,89.567 P9.2@135.668,73.914
OUT_CH_PI5: P10.1 R55_InputPort5.2 | length 29.4
  Top Layer w0.254: R55_InputPort5.2@117.63,99.695 117.63,96.746 119.126,95.25 119.126,94.266 P10.1@135.668,77.724
OUT_CH_PI6: P10.2 R55_InputPort6.2 | length 33.3
  Top Layer w0.254: R55_InputPort6.2@117.63,105.41 119.634,103.406 119.634,94.259 132.359,81.534 P10.2@135.668,81.534
OUT_CH_PI7: P11.1 R55_InputPort7.2 | length 37.1
  Top Layer w0.254: R55_InputPort7.2@117.63,111.125 120.142,108.613 120.142,94.251 129.049,85.344 P11.1@135.668,85.344
OUT_CH_PI8: P11.2 R55_InputPort8.2 | length 41
  Top Layer w0.254: R55_InputPort8.2@117.63,116.84 120.523,113.947 120.523,94.371 125.74,89.154 P11.2@135.668,89.154
OUT_CH_PO1: P4.1 Q2_OutputPort1.2 | length 11.7
  Top Layer w0.254: Q2_OutputPort1.2@125.095,31.75 126.365,30.48 134.144,30.48 P4.1@135.668,32.004
OUT_CH_PO2: P4.2 Q2_OutputPort2.2 | length 11.3
  Top Layer w0.254: Q2_OutputPort2.2@125.095,37.465 126.365,36.195 132.842,36.195 133.223,35.814 P4.2@135.668,35.814
OUT_CH_PO3: P5.1 Q2_OutputPort3.2 | length 12
  Top Layer w0.254: Q2_OutputPort3.2@125.095,43.18 126.365,41.91 131.318,41.91 133.604,39.624 P5.1@135.668,39.624
OUT_CH_PO4: P5.2 Q2_OutputPort4.2 | length 12.8
  Top Layer w0.254: Q2_OutputPort4.2@125.095,48.895 126.365,47.625 130.429,47.625 134.62,43.434 P5.2@135.668,43.434
OUT_CH_PO5: P6.1 Q2_OutputPort5.2 | length 14.1
  Top Layer w0.254: Q2_OutputPort5.2@125.095,54.61 126.365,53.34 130.429,53.34 135.668,48.101 P6.1@135.668,47.244
OUT_CH_PO6: P6.2 Q2_OutputPort6.2 | length 16
  Top Layer w0.254: Q2_OutputPort6.2@125.095,60.325 126.365,59.055 130.429,59.055 131.699,57.785 131.699,55.023 P6.2@135.668,51.054
OUT_CH_PO7: P7.1 Q2_OutputPort7.2 | length 17.9
  Top Layer w0.254: Q2_OutputPort7.2@125.095,66.04 126.365,64.77 130.429,64.77 131.699,63.5 131.699,58.833 P7.1@135.668,54.864
OUT_CH_PO8: P7.2 Q2_OutputPort8.2 | length 17.9
  Top Layer w0.254: Q2_OutputPort8.2@125.095,71.755 126.365,70.485 127.127,70.485 132.334,65.278 132.334,62.008 P7.2@135.668,58.674
RESET_ETH: R37.1
RMII_CRS_DV: R33.1 U1.32 | length 56.8
  Top Layer w0.254: v1(64.516,71.247) 64.722,71.041 U1.32@64.722,66.776 ; R33.1@87.15,97.917 v1(89.662,97.917)
  Bottom Layer w0.254: v1(64.516,71.247) 64.516,72.009 66.167,73.66 80.453,73.66 93.553,86.76 93.553,95.804 91.44,97.917 v1(89.662,97.917)
RMII_REFCLK: R36.1 U1.24 | length 75.6
  Top Layer w0.254: U1.24@69.697,64.301 74.588,64.301 v1(78.232,67.945) ; R36.1@77.47,110.01 v1(77.47,114.681)
  Bottom Layer w0.254: v1(77.47,114.681) 80.137,112.014 81.026,112.014 94.261,98.779 94.261,86.429 78.359,70.527 78.359,68.072 v1(78.232,67.945)
RMII_RXD0: R32.1 U1.33 | length 55.7
  Top Layer w0.254: v1(63.146,71.247) 64.222,70.171 U1.33@64.222,66.776 ; R32.1@87.15,95.885 v1(89.662,95.885)
  Bottom Layer w0.254: v1(63.146,71.247) 63.146,71.655 65.532,74.041 80.295,74.041 93.199,86.945 93.199,94.126 91.44,95.885 v1(89.662,95.885)
RMII_RXD1: R31.1 U1.34 | length 54.2
  Top Layer w0.254: v1(63.119,73.025) 63.119,72.439 62.284,71.604 62.284,70.739 63.722,69.301 U1.34@63.722,66.776 ; R31.1@87.15,93.853 v1(89.662,93.853)
  Bottom Layer w0.254: v1@63.337,72.807 64.951,74.422 80.137,74.422 92.837,87.122 92.837,92.456 91.44,93.853 v1(89.662,93.853)
RMII_TXD0: R29.1 U1.51 | length 61.3
  Top Layer w0.254: v1(51.054,65.659) 51.912,64.801 U1.51@53.747,64.801 ; R29.1@69.342,110.01 69.342,110.998 v1(69.342,112.395)
  Bottom Layer w0.254: v1(51.054,65.659) 50.292,65.659 49.657,66.294 49.657,70.866 52.959,74.168 52.959,96.012 v1(69.342,112.395)
RMII_TXD1: R30.1 U1.52 | length 64.6
  Top Layer w0.254: v1(51.054,63.627) 51.728,64.301 U1.52@53.747,64.301 ; R30.1@67.31,110.01 67.31,110.998 v1(67.31,112.395)
  Bottom Layer w0.254: v1(51.054,63.627) 49.45,63.627 47.625,65.452 47.625,70.866 50.927,74.168 50.927,96.012 v1(67.31,112.395)
RMII_TXEN: R28.1 U1.48 | length 55.6
  Top Layer w0.254: v1(55.118,71.12) 55.245,71.12 55.245,69.977 56.722,68.5 U1.48@56.722,66.776 ; R28.1@71.374,110.01 71.374,110.998 v1(71.374,112.395)
  Bottom Layer w0.254: v1(55.118,71.12) 55.118,74.295 54.991,74.422 54.991,96.012 v1(71.374,112.395)
SPEED_K: CN1.10
SPI1_MOSI: R58.1 U1.91 | length 37.9
  Top Layer w0.254: R58.1@71.656,133.223 75.057,129.822 75.057,119.761 77.216,117.602 80.326,117.602 90.116,107.812 90.116,105.421 89.693,104.998
SPI1_SCK: U1.30
SPI2_MOSI: R59.1 U1.18 | length 42.3
  Top Layer w0.254: R59.1@71.656,137.033 75.565,133.124 75.565,119.761 77.216,118.11 80.536,118.11 90.47,108.176 90.47,105.057 90.052,104.639
SPI2_SCK: U1.47
SWCLK: P1.4 R3.2 U1.76 | length 35.7
  Top Layer w0.254: R3.2@48.006,41.938 48.006,41.656 49.022,40.64 49.022,36.703 48.26,35.941 P1.4@48.26,34.925 ; U1.76@55.722,50.826 55.722,52.674 56.642,53.594 v2(58.547,53.594)
  Bottom Layer w0.254: P1.4@48.26,34.925 48.26,39.497 56.388,47.625 56.388,51.435 v2(58.547,53.594)
SWDIO: P1.2 R4.2 U1.72 | length 31.8
  Top Layer w0.254: R4.2@45.212,41.938 46.736,40.414 46.736,37.719 45.72,36.703 P1.2@45.72,34.925 ; v2(51.308,50.038) 51.308,53.594 52.015,54.301 U1.72@53.747,54.301
  Bottom Layer w0.254: P1.2@45.72,34.925 45.72,38.481 51.308,44.069 v2(51.308,50.038)
SWO: P1.6 R2.2 U1.89 | length 32.9
  Top Layer w0.254: R2.2@50.038,41.938 50.94,41.036 50.94,35.065 P1.6@50.8,34.925 ; U1.89@62.222,50.826 v2@62.222,52.959 ; v2(62.23,52.959) 62.23,53.467
  Bottom Layer w0.254: P1.6@50.8,34.925 50.8,41.021 62.23,52.451 v2(62.23,52.959)
TDI: P1.8 R1.2 U1.77 | length 40.1
  Top Layer w0.254: R1.2@52.133,42.001 52.994,42.001 53.34,41.656 P1.8@53.34,34.925 ; U1.77@56.222,50.826 56.222,52.285 56.642,52.705 59.944,52.705 v2(60.706,53.467)
  Bottom Layer w0.254: P1.8@53.34,34.925 53.34,42.164 63.246,52.07 63.246,53.467 62.738,53.975 61.214,53.975 v2(60.706,53.467)
USART2_CK: U1.88
USART2_CTS: U1.84
USART3_CK: U1.57
USART3_CTS: U1.58
USB_ID: R21.1 U1.69 | length 18.8
  Top Layer w0.254: R21.1@44.097,56.007 42.672,57.432 42.672,60.833 42.926,61.087 45.346,61.087 50.632,55.801 U1.69@53.747,55.801
USB_N: R19.1 U1.70 | length 11.6
  Top Layer w0.381: R19.1@44.097,60.071 45.085,60.071 45.847,59.309 46.355,59.309 50.295,55.368 52.256,55.368 52.324,55.301 U1.70@53.747,55.301
USB_OVC: R17.1 U1.66 | length 17
  Top Layer w0.254: R17.1@43.843,48.514 v2(45.339,48.514) ; v2(51.689,57.277) 51.713,57.301 U1.66@53.747,57.301
  Bottom Layer w0.254: v2(45.339,48.514) 48.895,48.514 49.557,49.176 49.557,55.145 v2(51.689,57.277)
USB_P: R20.1 U1.71 | length 11.6
  Top Layer w0.381: R20.1@44.097,58.039 45.212,58.039 45.847,58.674 46.092,58.674 50.032,54.733 52.256,54.733 52.324,54.801 U1.71@53.747,54.801
USB_PWR: R16.1 U1.65 | length 25.4
  Top Layer w0.254: R16.1@43.843,45.593 v2(45.339,45.593) ; v2(50.546,57.531) 51.125,58.11 51.871,58.11 52.181,57.801 U1.65@53.747,57.801
  Bottom Layer w0.254: v2(45.339,45.593) 49.276,45.593 49.911,46.228 49.911,54.229 52.832,57.15 52.832,57.785 52.578,58.039 50.8,58.039 50.546,57.785 v2(50.546,57.531)
USB_VBUS: R18.1 U1.68 | length 12.1
  Top Layer w0.254: R18.1@44.097,62.103 44.958,62.103 50.76,56.301 U1.68@53.747,56.301
USBCON_N: P2.2 R19.2 | length 4.4
  Top Layer w0.381: P2.2@37.06,59.601 39.535,59.601 40.005,60.071 R19.2@41.247,60.071
USBCON_P: P2.3 R20.2 | length 4.5
  Top Layer w0.381: P2.3@37.06,58.801 39.37,58.801 40.132,58.039 R20.2@41.247,58.039
VCC: C1.1 C2.1 C3.1 C4.2 C5.2 C6.2 L1.1 P1.1 R1.1 R2.1 R4.1 R10.1 R11.2 R13.2 R14.2 R15.2 U1.6 U1.11 U1.19 U1.28 U1.50 U1.75 U1.100 | length 59.5
  Top Layer w0.254: R13.2@33.302,48.133 34.925,48.133 35.207,48.415 R15.2@36.703,48.415 R14.2@38.735,48.415 ; R4.1@45.212,39.088 44.041,39.088 43.18,38.227 43.18,33.274 44.069,32.385 P1.1@45.72,32.385 ; v1(53.415,66.802) U1.50@55.696,66.802 ; v1(65.659,64.516) 66.04,64.516 66.722,65.198 U1.28@66.722,66.776 ; v1(67.056,60.071) 67.056,60.579 68.278,61.801 U1.19@69.697,61.801 ; v1(67.437,57.785) 67.453,57.801 U1.11@69.697,57.801 ; v1(67.452,55.372) 67.381,55.301 U1.6@69.697,55.301
  Bottom Layer w0.254: v1(53.415,66.802) 54.578,66.802 C5.2@54.61,66.77
  Bottom Layer w1: C6.2@53.753,51.435 54.737,51.435 57.15,53.848 57.15,61.849 56.007,61.849 54.61,63.246 C5.2@54.61,66.77 ; 64.262,62.865 64.262,64.516 ; v1(65.659,64.516) 64.262,64.516 ; C4.2@65.913,66.77 64.992,66.77 64.262,66.04 64.262,64.516 ; C2.1@69.691,57.785 C3.1@69.691,61.214
VDD3V3: C18.2 C19.2 C20.2 C21.2 C22.2 C23.2 C24.2 C25.2 C30.2 C31.2 CN1.4 CN1.5 L2.1 R22.2 R23.2 R24.2 R25.2 R26.2 R27.2 R38.1 R39.1 U3.6 U3.9 | length 43.1
  Top Layer w0.254: CN1.4@48.641,93.98 50.927,93.98 51.816,93.091 C20.2@53.562,93.091 ; R39.1@50.447,82.931 C18.2@53.562,82.931 56.162,85.531 R26.2@56.162,86.741 ; R38.1@50.447,105.156 C19.2@53.562,105.156 56.162,102.556 R25.2@56.162,101.346 ; R27.2@56.162,89.281 53.562,91.881 C20.2@53.562,93.091 ; R24.2@56.162,98.933 53.562,96.333 C21.2@53.562,95.631 C20.2@53.562,93.091 ; U3.6@79.429,97.191 79.429,92.656 80.518,91.567 C24.2@80.518,90.71
  Bottom Layer w0.254: CN1.5@46.101,92.71 47.371,93.98 CN1.4@48.641,93.98
VDD5V: C34.2 C35.2 C38.2 C39.2 U5.1 U6.1
WEN: U1.90
pads on no net: CN1.7 J1.6 J1.7 J1.8 J1.13 J1.14 J1.15 P1.7 P2.MH1 P2.MH2 U1.7 U1.8 U1.9 U1.15 U1.17 U1.26 U1.29 U1.35 U1.36 U1.53 U1.54 U1.61 U1.62 U1.63 U1.64 U1.93 U1.95 U1.96 U2.3 U2.7 U2.8 U3.10 U5.4 U5.7 U6.4 U6.7 U10.8
copper on no net:
  other v4: 42.801,85.4 42.801,101.28
  other v5: 39.751,87.62 39.751,99.06

## Keep-outs
Keep-Out Layer:
  the board outline again, w0.254

## Other copper
Top Layer:
  region net NetC9_2: 77.184,73.787 74.323,73.787 74.323,71.247 77.184,71.247
Bottom Layer:
  region net VCC: 68.072,60.833 66.04,60.833 66.04,58.547 68.072,58.547
  region net VCC: 66.04,63.5 56.515,63.5 56.515,58.547 66.04,58.547
  region net VCC: 70.485,58.547 56.515,58.547 56.515,54.356 70.485,54.356

## Text inside footprints (layer, text, board x,y; h text height)
J1: Top Overlay "9" at 33.804,115.269 h1.5 r90; Top Overlay "15" at 33.804,131.264 h1.5 r90; Top Overlay "8" at 43.304,133.731 h1.5 r90; Top Overlay "1" at 43.304,114.134 h1.5 r90
P1: Top Overlay "10" at 57.404,34.417 h0.8; Top Overlay "9" at 57.404,31.877 h0.8; Top Overlay "1" at 43.688,31.877 h0.8; Top Overlay "2" at 43.18,34.417 h0.8
P2: Mechanical 1 "PCB Edge" at 28.778,62.837 h0.8 r270